# Altium PCB Main.PcbDoc
Units mm, origin at the board's own origin, x right, y up, seen from the top; angles counter-clockwise.
Board outline 100 x 100 mm, 2 copper layers (Top Layer, Bottom Layer), stack 1.56 mm thick; 99 components, 77 nets, 372 pads, 0 vias.
Unrouted connection lines stored in the file: 255.
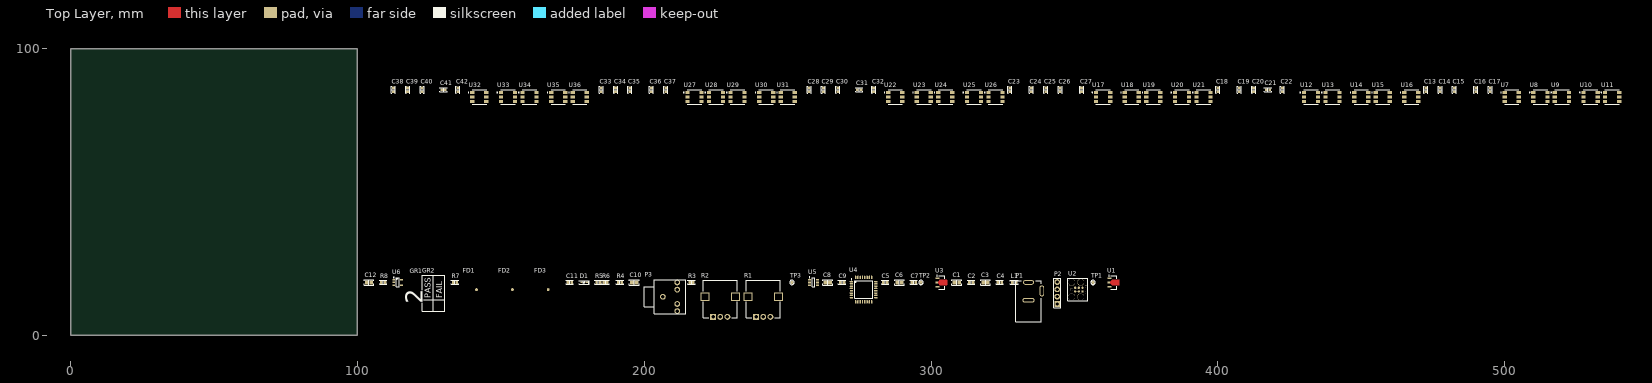
[diagram p0: Top Layer view]
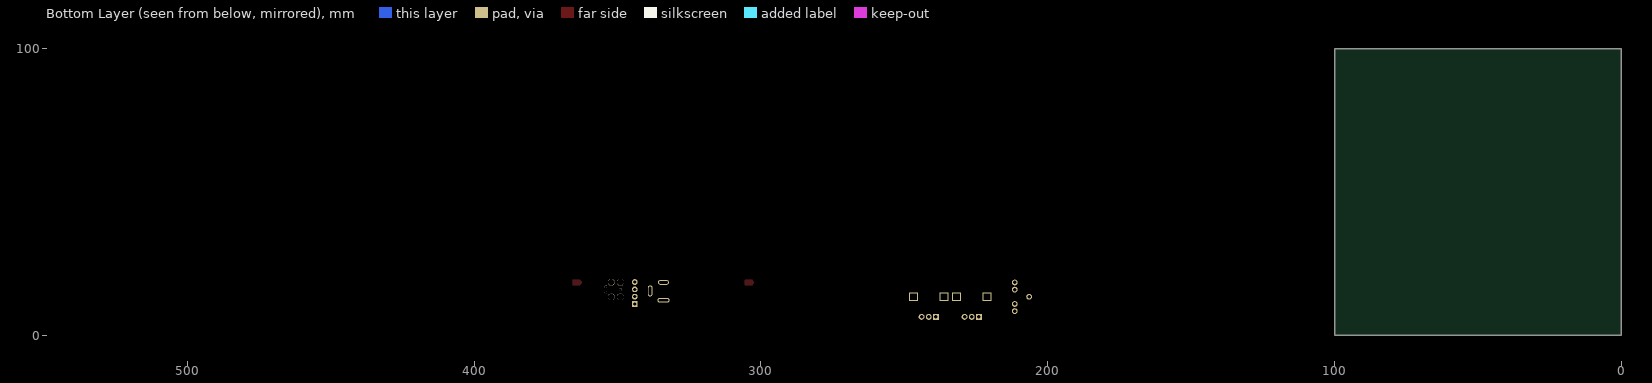
[diagram p1: Bottom Layer view, seen from below]

## Layer stack, top to bottom
Top Solder: solder mask 0.02, Solder Resist, Dk 3.5
Top Layer: signal copper 0.03
Dielectric 1: dielectric 1.5, FR-4, Dk 4.8
Bottom Layer: signal copper 0.03
Bottom Solder: solder mask 0.02, Solder Resist, Dk 3.5

## Board outline
0,0 100,0 100,100 0,100

## Design rules (kind name [scope] priority, off if disabled: settings)
AcuteAngle [All] p1: minimum=6.00000000000000E+0001 checktracksonly=TRUE
AssemblyTestPointUsage [(not InNetClass('NOTESTPOINTS'))] p1: allowmultiple=TRUE
AssemblyTestPointUsage AssemblyTestPointUsageN [InNetClass('NOTESTPOINTS')] p2: valid=2 allowmultiple=TRUE
AssemblyTestpoint [All] p1: testpointundercomponent=TRUE minsize=0.8 maxsize=2 preferedsize=1 minholesize=0 maxholesize=0.35 preferedholesize=0 testpointgrid=1.27 usegrid=FALSE gridoriginx=87.5 gridoriginy=62.5 gridtolerance=0 allowsidetop=TRUE minspacing=2.54 // Zollner
BoardOutlineClearance BoardCopperOutlineClearance [(OnLayer('Top Layer') OR OnLayer('Bottom Layer') )] p1: gap=0.5 ignorepadtopadclearanceinfootprint=FALSE except(1: Poly-OutlineEdge Region-OutlineEdge; 1.5: SMDPad-OutlineEdge THPad-OutlineEdge)
Clearance PadToViaClearance [IsVia and not IsComponentVia vs IsPad] p1: gap=0.025 ignorepadtopadclearanceinfootprint=TRUE
Clearance "Clearance NOTSELV-SELV" [InNetClass('NOTSELV') vs NOT InNetClass('NOTSELV')] p2: gap=6 ignorepadtopadclearanceinfootprint=FALSE // according to previous calio PCB
Clearance "Clearance (FAB)" [All] p3: gap=0.203 ignorepadtopadclearanceinfootprint=TRUE except(0.305: Arc-Poly Track-Poly SMDPad-Poly THPad-Poly Via-Poly Fill-Poly Poly-Poly)
ComponentClearance ComponentClearance_NetTie [((ObjectKind = 'Component') And (ComponentType = 'Net Tie')) Or (Footprint = 'StarPoint') Or (Footprint like 'NetTieVia*')] p1: gap=-3.81 collisioncheckmode=3 verticalgap=-3.81 showdistances=FALSE
ComponentClearance [All] p2: gap=0.254 collisioncheckmode=3 verticalgap=0.254 showdistances=FALSE
DiffPairsRouting [All] p1: maxlimit=1.27 minlimit=0.203 mostfreqgap=0.203 toplayer_minwidth=0.152 toplayer_maxwidth=2.54 toplayer_prefwidth=0.254 bottomlayer_minwidth=0.152 bottomlayer_maxwidth=2.54 bottomlayer_prefwidth=0.254 maxuncoupledlength=12.7
FabricationTestPointUsage [All] p1: valid=2 allowmultiple=FALSE
FabricationTestpoint [All] p1: side=3 testpointundercomponent=TRUE minsize=1.016 maxsize=2.54 preferedsize=1.524 minholesize=0 maxholesize=1.016 preferedholesize=0.813 testpointgrid=0.025 allowsidetop=TRUE allowsidebottom=TRUE usegrid=FALSE gridtolerance=0
HoleSize [All] p1: absolutevalues=TRUE maxlimit=6.35 minlimit=0.3 maxpercent=80.000 minpercent=20.000 // Zollner
HoleToHoleClearance HoleToHoleClearance_NetTieVia [InPadClass('NetTieVias') vs InPadClass('NetTieVias')] p1: gap=0 allowstackedmicrovias=TRUE
HoleToHoleClearance [All] p2: gap=0.25 allowstackedmicrovias=TRUE // Zollner
MinimumAnnularRing [All] p1: minimumring=0.15 // PCBWAY
MinimumSolderMaskSliver [All] p1: minsoldermaskwidth=0.2 // Zollner
PlaneClearance PlaneClearance_1 [All] p1: clearance=0.508
PlaneConnect [All] p1: pad.planeconnectstyle=Relief pad.reliefexpansion=0.508 pad.reliefentries=4 pad.reliefconductorwidth=0.254 pad.reliefairgap=0.254 via.planeconnectstyle=Direct via.reliefexpansion=0.508 via.reliefentries=4 via.reliefconductorwidth=0.254 via.reliefairgap=0.254
PolygonConnect [All] p1: thpad.connectstyle=Relief thpad.reliefconductorwidth=0.254 thpad.reliefentries=4 thpad.polygonreliefangle="90 Angle" thpad.airgapwidth=0.254 smdpad.connectstyle=Relief smdpad.reliefconductorwidth=0.254 smdpad.reliefentries=4 smdpad.polygonreliefangle="90 Angle" smdpad.airgapwidth=0.254 via.connectstyle=Direct via.reliefconductorwidth=0.254 via.reliefentries=4 via.polygonreliefangle="90 Angle" via.airgapwidth=0.254
RoomDefinition Main_LEDs [InComponentClass('Main_LEDs')] p1: confinementstyle=ConfineIn formatcopy=TRUE lockcomponents=FALSE outline 110,78.175 542.5,78.175 542.5,90.675 110,90.675
RoomDefinition Main [InComponentClass('Main')] p2: confinementstyle=ConfineIn formatcopy=TRUE lockcomponents=FALSE outline 101.5,3.5 366.5,3.5 366.5,26 101.5,26
RoutingVias [All] p1: holewidth=0.35 width=0.7 viastyle="Through Hole" minholewidth=0.3 minwidth=0.6 maxholewidth=1.27 maxwidth=1.27
SMDEntry [not IsTestpoint] p1: side=TRUE corner=TRUE anyangle=FALSE
SMDNeckDown [not IsTestpoint] p1: percent=90.000
SMDToCorner [All] p1: distance=10000
SMDToPlane [All] p1: distance=0
ShortCircuit [All vs not IsBoardCutoutRegion] p1: allowed=FALSE
SilkToSolderMaskClearance [IsPad] p1: minsilkscreentomaskgap=0.127 clearancetoexposedcopper=TRUE
SolderMaskExpansion [All] p1: expansion=0.05 istentingtop=FALSE // Zollner
SolderMaskExpansion SolderMaskExpansionToHoles [All] p2: expansion=0.1 istentingtop=FALSE soldermaskfromhole=TRUE // Zollner
UnRoutedNet [All] p1: checkbadconnections=TRUE
Width [All] p1: maxlimit=12.7 minlimit=0.203 preferedwidth=0.254
16 further rules are at their usual default settings.

## Classes and differential pairs
component class Main: C1 C2 C3 C4 C5 C6 C7 C8 C9 C10 C11 C12 D1 FD1 FD2 FD3 GR1 GR2 L1 P1 P2 P3 R1 R2 R3 R4 R5 R6 R7 R8 TP1 TP2 TP3 U1 U2 U3 U4 U5 U6
component class Main_LEDs: C13 C14 C15 C16 C17 C18 C19 C20 C21 C22 C23 C24 C25 C26 C27 C28 C29 C30 C31 C32 C33 C34 C35 C36 C37 C38 C39 C40 C41 C42 U7 U8 U9 U10 U11 U12 U13 U14 U15 U16 U17 U18 U19 U20 U21 U22 U23 U24 U25 U26 U27 U28 U29 U30 U31 U32 U33 U34 U35 U36

## Components (designator, comment, footprint, x,y, rotation, side; value= is the part's Value field where it differs from the comment)
C1 "10uF" "CAP 0805_2012" 309,18.5 r0 top
C2 "100nF" "CAP 0603_1608" 314,18.5 r0 top
C3 "10uF" "CAP 0805_2012" 319,18.5 r0 top
C4 "100nF" "CAP 0603_1608" 324,18.5 r0 top
C5 "100nF" "CAP 0603_1608" 284,18.5 r0 top
C6 "10uF" "CAP 0805_2012" 289,18.5 r0 top
C7 "100nF" "CAP 0603_1608" 294,18.5 r0 top
C8 "10uF" "CAP 0805_2012" 264,18.5 r0 top
C9 "100nF" "CAP 0603_1608" 269,18.5 r0 top
C10 "10uF" "CAP 0805_2012" 196.5,18.5 r0 top
C11 "100nF" "CAP 0603_1608" 174,18.5 r0 top
C12 "10uF" "CAP 0805_2012" 104,18.5 r0 top
C13 "100nF" "CAP 0603_1608" 472.5,85.675 r90 top
C14 "100nF" "CAP 0603_1608" 477.5,85.675 r90 top
C15 "100nF" "CAP 0603_1608" 482.5,85.675 r90 top
C16 "100nF" "CAP 0603_1608" 490,85.675 r90 top
C17 "100nF" "CAP 0603_1608" 495,85.675 r90 top
C18 "100nF" "CAP 0603_1608" 400,85.675 r90 top
C19 "100nF" "CAP 0603_1608" 407.5,85.675 r90 top
C20 "100nF" "CAP 0603_1608" 412.5,85.675 r90 top
C21 "100nF" "CAP 0603_1608" 417.5,85.675 r0 top
C22 "100nF" "CAP 0603_1608" 422.5,85.675 r90 top
C23 "100nF" "CAP 0603_1608" 327.5,85.675 r90 top
C24 "100nF" "CAP 0603_1608" 335,85.675 r90 top
C25 "100nF" "CAP 0603_1608" 340,85.675 r90 top
C26 "100nF" "CAP 0603_1608" 345,85.675 r90 top
C27 "100nF" "CAP 0603_1608" 352.5,85.675 r90 top
C28 "100nF" "CAP 0603_1608" 257.5,85.675 r90 top
C29 "100nF" "CAP 0603_1608" 262.5,85.675 r90 top
C30 "100nF" "CAP 0603_1608" 267.5,85.675 r90 top
C31 "100nF" "CAP 0603_1608" 275,85.675 r0 top
C32 "100nF" "CAP 0603_1608" 280,85.675 r90 top
C33 "100nF" "CAP 0603_1608" 185,85.675 r90 top
C34 "100nF" "CAP 0603_1608" 190,85.675 r90 top
C35 "100nF" "CAP 0603_1608" 195,85.675 r90 top
C36 "100nF" "CAP 0603_1608" 202.5,85.675 r90 top
C37 "100nF" "CAP 0603_1608" 207.5,85.675 r90 top
C38 "100nF" "CAP 0603_1608" 112.5,85.675 r90 top
C39 "100nF" "CAP 0603_1608" 117.5,85.675 r90 top
C40 "100nF" "CAP 0603_1608" 122.5,85.675 r90 top
C41 "100nF" "CAP 0603_1608" 130,85.675 r0 top
C42 "100nF" "CAP 0603_1608" 135,85.675 r90 top
D1 "3.3V" SOD523F 179,18.5 r0 top
FD1 "IPC-7351A FIDUCIAL" FIDUCIAL-IPC-7351A 141.5,16 r0 top
FD2 "IPC-7351A FIDUCIAL" FIDUCIAL-IPC-7351A 154,16 r0 top
FD3 "IPC-7351A FIDUCIAL" FIDUCIAL-IPC-7351A 166.5,16 r0 top
GR1 "Fermium logo" FERMIUM_LTD_LOGO_SILKSCREEN_10 121.5,11 r90 top
GR2 "PASS-FAIL" 0B1556B7-A534-4801-B57D-01EFA34B1205 126.5,8.5 r90 top
L1 "MPZ1608S102ATA00" "FER 0603_1608" 329,18.5 r0 top
P1 "DC-005A-20A" F0972D8A-C5C0-4A84-836D-A9666EE65C2D 334,18.5 r90 top
P2 "Header 4" e9c29c42-54d9-41fd-bacf-81f9be1beea3 344,11 r90 top
P3 "PJ-3900-04" 7EF2B92C-0FC9-4C85-B662-5CEC65BFCCC4 206.5,13.5 r0 top
R1 "10K" 62a97406-280f-49a8-9d3d-28b5dbb37269 241.5,13.5 r0 top
R2 "10K" 62a97406-280f-49a8-9d3d-28b5dbb37269 226.5,13.5 r0 top
R3 "10K" "RES 0603_1608" 216.5,18.5 r0 top
R4 "1K" "RES 0603_1608" 191.5,18.5 r0 top
R5 "10K" "RES 0603_1608" 184,18.5 r0 top
R6 "10K" "RES 0603_1608" 186.5,18.5 r0 top
R7 "10K" "RES 0603_1608" 134,18.5 r0 top
R8 "10K" "RES 0603_1608" 109,18.5 r0 top
TP1 "GENERIC_TP" TESTPOINT_PAD_1 356.5,18.5 r0 top
TP2 "GENERIC_TP" TESTPOINT_PAD_1 296.5,18.5 r90 top
TP3 "GENERIC_TP" TESTPOINT_PAD_1 251.5,18.5 r90 top
U1 "AS78L05RTR-E1" E733EFB9-FE91-4AE9-9197-29251971C3DC 364,18.5 r0 top
U2 "PCB TC-2030" 2B810B8A-BCA2-4013-BFB9-397E8F2967E9 349,16 r0 top
U3 "L78L33ACUTR" E733EFB9-FE91-4AE9-9197-29251971C3DC 304,18.5 r0 top
U4 "STM32G031K6T6" "ST LQFP-32 7X7MM" 276.5,16 r0 top
U5 "74LVC1T45W6-7" cf179999-1370-4c97-8dae-266d481a25b7 259,18.5 r0 top
U6 "LMV321TP-TR" "TI SOT-23-5 DBV" 114,18.5 r0 top
U7 "WS2815B" C2100EF9-5A1B-4012-AEAB-289AE8E97B6B 502.5,83.175 r0 top
U8 "WS2815B" C2100EF9-5A1B-4012-AEAB-289AE8E97B6B 512.5,83.175 r0 top
U9 "WS2815B" C2100EF9-5A1B-4012-AEAB-289AE8E97B6B 520,83.175 r0 top
U10 "WS2815B" C2100EF9-5A1B-4012-AEAB-289AE8E97B6B 530,83.175 r0 top
U11 "WS2815B" C2100EF9-5A1B-4012-AEAB-289AE8E97B6B 537.5,83.175 r0 top
U12 "WS2815B" C2100EF9-5A1B-4012-AEAB-289AE8E97B6B 432.5,83.175 r0 top
U13 "WS2815B" C2100EF9-5A1B-4012-AEAB-289AE8E97B6B 440,83.175 r0 top
U14 "WS2815B" C2100EF9-5A1B-4012-AEAB-289AE8E97B6B 450,83.175 r0 top
U15 "WS2815B" C2100EF9-5A1B-4012-AEAB-289AE8E97B6B 457.5,83.175 r0 top
U16 "WS2815B" C2100EF9-5A1B-4012-AEAB-289AE8E97B6B 467.5,83.175 r0 top
U17 "WS2815B" C2100EF9-5A1B-4012-AEAB-289AE8E97B6B 360,83.175 r0 top
U18 "WS2815B" C2100EF9-5A1B-4012-AEAB-289AE8E97B6B 370,83.175 r0 top
U19 "WS2815B" C2100EF9-5A1B-4012-AEAB-289AE8E97B6B 377.5,83.175 r0 top
U20 "WS2815B" C2100EF9-5A1B-4012-AEAB-289AE8E97B6B 387.5,83.175 r0 top
U21 "WS2815B" C2100EF9-5A1B-4012-AEAB-289AE8E97B6B 395,83.175 r0 top
U22 "WS2815B" C2100EF9-5A1B-4012-AEAB-289AE8E97B6B 287.5,83.175 r0 top
U23 "WS2815B" C2100EF9-5A1B-4012-AEAB-289AE8E97B6B 297.5,83.175 r0 top
U24 "WS2815B" C2100EF9-5A1B-4012-AEAB-289AE8E97B6B 305,83.175 r0 top
U25 "WS2815B" C2100EF9-5A1B-4012-AEAB-289AE8E97B6B 315,83.175 r0 top
U26 "WS2815B" C2100EF9-5A1B-4012-AEAB-289AE8E97B6B 322.5,83.175 r0 top
U27 "WS2815B" C2100EF9-5A1B-4012-AEAB-289AE8E97B6B 217.5,83.175 r0 top
U28 "WS2815B" C2100EF9-5A1B-4012-AEAB-289AE8E97B6B 225,83.175 r0 top
U29 "WS2815B" C2100EF9-5A1B-4012-AEAB-289AE8E97B6B 232.5,83.175 r0 top
U30 "WS2815B" C2100EF9-5A1B-4012-AEAB-289AE8E97B6B 242.5,83.175 r0 top
U31 "WS2815B" C2100EF9-5A1B-4012-AEAB-289AE8E97B6B 250,83.175 r0 top
U32 "WS2815B" C2100EF9-5A1B-4012-AEAB-289AE8E97B6B 142.5,83.175 r0 top
U33 "WS2815B" C2100EF9-5A1B-4012-AEAB-289AE8E97B6B 152.5,83.175 r0 top
U34 "WS2815B" C2100EF9-5A1B-4012-AEAB-289AE8E97B6B 160,83.175 r0 top
U35 "WS2815B" C2100EF9-5A1B-4012-AEAB-289AE8E97B6B 170,83.175 r0 top
U36 "WS2815B" C2100EF9-5A1B-4012-AEAB-289AE8E97B6B 177.5,83.175 r0 top

## Footprints (in the part's own frame and the unit in brackets; to place one, negate y for a bottom-side part, rotate by r counter-clockwise, add the part's x,y. Pads: shape width x height; smd on the part's side, far side on the other; paste and mask are expansions set on the pad)
0B1556B7-A534-4801-B57D-01EFA34B1205 [mm]
  silkscreen extent 0,-4 12.5,4
2B810B8A-BCA2-4013-BFB9-397E8F2967E9 [mil]
  round 31 smd paste-393.7: 1(50,-25) 2(50,25) 3(100,-25) 4(100,25) 5(150,-25) 6(150,25)
  round 34 hole 35 unplated: A(0,0) B(200,40) C(200,-40)
  round 92 hole 93 unplated: D(0,-100) E(125,-100) F(0,100) G(125,100)
  silkscreen extent -55,-155 225,155
7EF2B92C-0FC9-4C85-B662-5CEC65BFCCC4 [mm]
  round 0 hole 1.5 unplated: 1(0,-5) 1(0,5)
  round 2 hole 1.2: 1(0,0) 2(5,5) 3(5,-5) 4(5,2.5) 5(5,-2.5)
  silkscreen extent -6.5,-6 8,6, body extent -6.5,-5.9 8,5.9, height 10
62a97406-280f-49a8-9d3d-28b5dbb37269 [mm]
  rect 2.05x2.05 hole 1.2: 1(-2.5,-7)
  round 2.05 hole 1.2: 2(0,-7) 3(2.5,-7)
  rect 3.05x2.85 hole 2.2 square: 4(-5.3,0) 4(5.3,0)
  silkscreen extent -6,-7.25 6,5.75, body extent -5.7,-7.15 5.7,5.5, height 19.9
C2100EF9-5A1B-4012-AEAB-289AE8E97B6B [mm]
  rect 1.5x1 smd paste+0 mask+0: 1(-2.45,1.6) 2(-2.45,0) 3(-2.45,-1.6) 4(2.45,-1.6) 5(2.45,0) 6(2.45,1.6)
  silkscreen extent -3.87,-2.5 2.5,2.5, body extent -3.3,-2.6 3.3,2.6, height 0.25
"CAP 0603_1608" [mm] "Chip Capacitor, 2-Leads, Body 1.60x0.80mm, IPC Medium Density"
  rect 0.9x1 smd: 1(-0.675,0) 2(0.675,0)
  silkscreen extent -1.27,-0.7 1.27,0.7, body extent -0.8,-0.41 0.8,0.41, height 0.82
"CAP 0805_2012" [mm] "Chip Capacitor, 2-Leads, Body 2.00x1.20mm, IPC Medium Density"
  rect 1.3x1.4 smd: 1(-0.8,0) 2(0.8,0)
  silkscreen extent -1.7,-0.9 1.7,0.9, body extent -1,-0.64 1,0.64, height 1.26
cf179999-1370-4c97-8dae-266d481a25b7 [mm] "SOT23, 6-Leads, Body 3.00x2.85mm, Pitch 0.95mm, IPC Medium Density"
  rect 1.05x0.6 smd: 1(-1.375,0.95) 2(-1.375,0) 3(-1.375,-0.95) 4(1.375,-0.95) 5(1.375,0) 6(1.375,0.95)
  silkscreen extent -1.5,-1.55 0.45,1.92, body extent -1.5,-1.55 1.5,1.55, height 1.85
e9c29c42-54d9-41fd-bacf-81f9be1beea3 [mm]
  rect 2x2 hole 1.1: 1(0,0)
  round 2 hole 1.1: 2(2.54,0) 3(5.08,0) 4(7.62,0)
  silkscreen extent -1.27,-1.27 8.89,1.27, body extent -1.27,-1.27 8.89,1.27, height 8.89
E733EFB9-FE91-4AE9-9197-29251971C3DC [mm]
  rect 1.4x0.6 smd: 1(-1.823,1.5) 3(-1.823,-1.5)
  rect 1x0.6 smd: 2(-2.023,0)
  Top Layer region: -1.523,0.3 -0.873,0.95 1.552,0.95 1.678,0.825 1.678,-0.825 1.552,-0.95 -0.873,-0.95 -1.523,-0.3
  silkscreen extent -2.07,-2.3 0.83,2.47, body extent -2.47,-2.25 1.68,2.25, height 1.5
F0972D8A-C5C0-4A84-836D-A9666EE65C2D [mm]
  oval 1.65x3.85 hole 0.8 slot 3 at 90 deg: 1(0,0)
  oval 1.65x4.2 hole 0.8 slot 3.35 at 90 deg: 2(-6.2,0)
  oval 3.85x1.65 hole 0.8 slot 3 at 0 deg: 3(-2.95,-4.65)
  silkscreen extent -13.7,-4.5 0.5,4.5, body extent -13.67,-4.75 0.43,4.55, height 10.9
"FER 0603_1608" [mm] "Chip Ferrite, 2-Leads, Body 1.60x0.80mm, IPC Medium Density"
  rect 0.9x1 smd: 1(-0.675,0) 2(0.675,0)
  silkscreen extent -1.4,-0.7 1.4,0.7, body extent -0.8,-0.41 0.8,0.41, height 0.82
FERMIUM_LTD_LOGO_SILKSCREEN_10 [mm]
FIDUCIAL-IPC-7351A [mm]
  round 1 smd paste-2.54 mask+1: 5(0,0)
  Top Layer pour cut-out: 0,-1.5 -0.574,-1.386 -1.061,-1.061 -1.386,-0.574 -1.5,0 -1.5,0 -1.386,0.574 -1.061,1.061 -0.574,1.386 0,1.5 0,1.5 0.574,1.386 1.061,1.061 1.386,0.574 1.5,0 1.5,0 1.386,-0.574 1.061,-1.061 0.574,-1.386 0,-1.5
"RES 0603_1608" [mm] "Chip Resistor, 2-Leads, Body 1.60x0.80mm, IPC Medium Density"
  rect 0.85x0.95 smd: 1(-0.65,0) 2(0.65,0)
  silkscreen extent -1.27,-0.7 1.27,0.7, body extent -0.8,-0.4 0.8,0.4, height 0.45
SOD523F [mm] "SODFL, 2-Leads, Body 0.80x1.60mm, IPC Medium Density"
  rect 0.8x0.5 smd: 1(0.9,0) 2(-0.9,0)
  silkscreen extent -1.6,-0.64 1.8,0.64, body extent -0.8,-0.4 0.8,0.4, height 0.65
"ST LQFP-32 7X7MM" [mm] "LQFP, 32-Leads, Body 7.00x7.00mm, Pitch 0.80mm, IPC Medium Density"
  oval 1.2x0.5 smd: 1(-4.25,2.8) 2(-4.25,2) 3(-4.25,1.2) 4(-4.25,0.4) 5(-4.25,-0.4) 6(-4.25,-1.2) 7(-4.25,-2) 8(-4.25,-2.8) 17(4.25,-2.8) 18(4.25,-2) 19(4.25,-1.2) 20(4.25,-0.4) 21(4.25,0.4) 22(4.25,1.2) 23(4.25,2) 24(4.25,2.8)
  oval 0.5x1.2 smd: 9(-2.8,-4.25) 10(-2,-4.25) 11(-1.2,-4.25) 12(-0.4,-4.25) 13(0.4,-4.25) 14(1.2,-4.25) 15(2,-4.25) 16(2.8,-4.25) 25(2.8,4.25) 26(2,4.25) 27(1.2,4.25) 28(0.4,4.25) 29(-0.4,4.25) 30(-1.2,4.25) 31(-2,4.25) 32(-2.8,4.25)
  silkscreen extent -4.37,-3.1 3.1,3.72, body extent -4.51,-4.51 4.51,4.51, height 1.55
TESTPOINT_PAD_1 [mm]
  round 1 smd: 1(0,0)
  silkscreen extent -0.76,-0.76 0.76,0.76
"TI SOT-23-5 DBV" [mm] "SOT23, 5-Leads, Body 2.90x2.80mm, Pitch 0.95mm, IPC Medium Density"
  rect 1x0.55 smd: 1(-1.35,0.95) 2(-1.35,0) 3(-1.35,-0.95) 4(1.35,-0.95) 5(1.35,0.95)
  silkscreen extent -1.47,-1.55 0.5,1.9, body extent -1.44,-1.42 1.39,1.48, height 1.5

## Part data
C1 C3 C6 C8 C10 C12: library part 1ffbe5a9-0884-4740-bdad-20a6a98400e6, "CAP SMD MLCC 10uF 25V 0805 X5R", Manufacturer 1="Samsung Electro-Mechanics", Manufacturer 2=Murata, Manufacturer Part Number 1=CL21A106KAYNNNE, Manufacturer Part Number 2=GRM21BR61E106KA73L, ComponentLink1Description=Datasheet, ComponentLink1URL=http://localhost:8080/static/files/Samsung-Electro-Mechanics-CL21A106KAYNNNE_C158502019-03-10_213827.610739.pdf?Samsung-Electro-Mechanics-CL21A106KAYNNNE_C15850.pdf, id=14779, Part Number=1ffbe5a9-0884-4740-bdad-20a6a98400e6, S 1=LCSC, S 2=LCSC, SPN 1=C15850, SPN 2=C84416
C2 C4 C5 C7 C9 C11 C13 C14 C15 C16 C17 C18 C19 C20 C21 C22 C23 C24 C25 C26 C27 C28 C29 C30 C31 C32 C33 C34 C35 C36 C37 C38 C39 C40 C41 C42: library part 02841f84-ac15-41b5-9e17-915f8f067828, "CAP SMD MLCC 100nF 25V 0603 X7R", Manufacturer 1="Samsung Electro-Mechanics", Manufacturer 2=Yageo, Manufacturer Part Number 1=CL10B104KA8NNNC, Manufacturer Part Number 2=CC0603KRX7R9BB104, ComponentLink1Description=Datasheet, ComponentLink1URL=http://localhost:8080/static/files/Samsung-Electro-Mechanics-CL10B104KA8NNNC_C15902019-03-10_215548.826887.pdf?Samsung-Electro-Mechanics-CL10B104KA8NNNC_C1590.pdf, id=14784, Part Number=02841f84-ac15-41b5-9e17-915f8f067828, S 1=LCSC, S 2=LCSC, SPN 1=C14663, SPN 2=C1590
D1: library part d6266fd0-7428-4fb9-a062-338cdce926fd, "DIODE SMD TVS 3.3V BIDIRECTIONAL SOD-523", Manufacturer 1="Born Semiconductor", Manufacturer 2=Nexperia, Manufacturer Part Number 1=PESD3V3S1BA-N, Manufacturer Part Number 2=PESD3V3S1UB,115, ComponentLink1Description=Datasheet, ComponentLink1URL=http://localhost:8080/static/files/Bourne-Semicon-Shenzhen-PESD3V3S1BA-N_C3160372019-04-07_002431.794112.pdf?Bourne-Semicon-Shenzhen-PESD3V3S1BA-N_C316037.pdf, ComponentLink2Description=Datasheet, ComponentLink2URL=http://localhost:8080/static/files/Nexperia-PESD3V3S1UB115-datasheet2019-08-16_201415.198759.pdf?Nexperia-PESD3V3S1UB,115-datasheet.pdf, id=14798, Part Number=d6266fd0-7428-4fb9-a062-338cdce926fd, S 1=LCSC, S 2=LCSC, SPN 1=C316037, SPN 2=C85377
FD1 FD2 FD3: library part 19da4612-eb95-43bb-9984-553a52b2a224, "GRAPHICS FIDUCIAL IPC-7351A", id=14800, Part Number=19da4612-eb95-43bb-9984-553a52b2a224
GR1: library part 9b9b4e4a-5411-4d6f-b18b-a922f0d19254, "GRAPHICS LOGO FERMIUM LTD", id=14856, Part Number=9b9b4e4a-5411-4d6f-b18b-a922f0d19254
GR2: library part d1abe19f-3fed-4f20-b2ed-afc0ffbc6628, "GRAPHICS PASS-FAIL MARK", id=14801, Part Number=d1abe19f-3fed-4f20-b2ed-afc0ffbc6628
L1: library part a4b2e015-bf25-47b8-954c-a5b040744a3a, "FER SMD CHIP 0603 800mA 1K@100MHz 300mOhm", Manufacturer 1=TDK, ComponentLink1Description=Datasheet, ComponentLink1URL=http://localhost:8080/static/files/TDK-MPZ1608S102ATA00_C768142019-08-18_021255.210641.pdf?TDK-MPZ1608S102ATA00_C76814.pdf, id=14850, Manufacturer Part Number 1=MPZ1608S102ATA00, Part Number=a4b2e015-bf25-47b8-954c-a5b040744a3a, S 1=LCSC, SPN 1=C76814
P1: library part b53db51a-1725-412b-9039-fa7a45c7c438, "CONN THT DC JACK 0.5A 30VDC 5Kcycles", Manufacturer 1="HRO Electronics", ComponentLink1Description=Datasheet, ComponentLink1URL="http://localhost:8080/static/files/Korean-Hroparts-Elec-DC-005A-20A_C191049_22019-03-10_214231.486078.pdf?Korean-Hroparts-Elec-DC-005A-20A_C191049 (2).pdf", id=14780, Manufacturer Part Number 1=DC-005A-20A, Part Number=b53db51a-1725-412b-9039-fa7a45c7c438, S 1=LCSC, SPN 1=C191049
P2: library part f5b883e6-c938-48c0-af3c-bf25c091d7e5, "CONN THT PIN HEADER 4P MALE 2.54mm", Manufacturer 1=Pinrex, Manufacturer 2=Mintron, Manufacturer Part Number 1=210-91-04GB01, Manufacturer Part Number 2=MTP125-1104S1, ComponentLink1Description=Datasheet, ComponentLink1URL=http://localhost:8080/static/files/1912111437_PINREX-210-91-04GB01_C3906802020-10-20_152510.967226.pdf?1912111437_PINREX-210-91-04GB01_C390680.pdf, ComponentLink2Description=Datasheet, ComponentLink2URL=http://localhost:8080/static/files/1901241805_MINTRON-MTP125-1104S1_C3586862020-10-20_152535.142763.pdf?1901241805_MINTRON-MTP125-1104S1_C358686.pdf, id=14864, Part Number=f5b883e6-c938-48c0-af3c-bf25c091d7e5, S 1=LCSC, S 2=LCSC, SPN 1=C390680, SPN 2=C358686
P3: library part 80507a24-5d7c-4cf5-953e-f54832d54564, "CONN THT 3.5mm AUDIO STEREO AUX SWITCH", Manufacturer 1="HRO Electronics", ComponentLink1Description=Datasheet, ComponentLink1URL=http://localhost:8080/static/files/Korean-Hroparts-Elec-PJ-3900-04_C1518392019-04-10_231144.687617.pdf?Korean-Hroparts-Elec-PJ-3900-04_C151839.pdf, id=14793, Manufacturer Part Number 1=PJ-3900-04, Part Number=80507a24-5d7c-4cf5-953e-f54832d54564, S 1=LCSC, SPN 1=C151839
R1 R2: library part 811e8213-c804-44c4-a27d-e9429bf8a5f3, "POT 10K 20% SHAFT 6mmx20mm LIN", Manufacturer 1=ALPS, Manufacturer Part Number 1=RK09K1130AAU, ComponentLink1Description=Datasheet, ComponentLink1URL=http://localhost:8080/static/files/ALPS-Electric-RK09K1130AAU_C2023732020-10-20_140659.863467.pdf?ALPS-Electric-RK09K1130AAU_C202373.pdf, id=14863, Part Number=811e8213-c804-44c4-a27d-e9429bf8a5f3, S 1=LCSC, SPN 1=C202373
R3 R5 R6 R7 R8: library part 93242766-ba1d-462d-b58f-ce1dfc4129c8, "RES SMD 10K OHM 1% 1/10W 0603", Manufacturer 1=Yageo, Manufacturer 2=Uniroyal, Manufacturer Part Number 1=RC0603FR-0710KL, Manufacturer Part Number 2=0603WAF1002T5E, id=12101, Part Number=93242766-ba1d-462d-b58f-ce1dfc4129c8, S 1=LCSC, S 2=LCSC, SPN 1=C98220, SPN 2=C25804
R4: library part a678220f-9e9d-4863-a833-9993504f723c, "RES SMD 1K OHM 1% 1/10W 0603", Manufacturer 1=Yageo, Manufacturer 2=Uniroyal, Manufacturer Part Number 1=RC0603FR-071KL, Manufacturer Part Number 2=0603WAF1001T5E, id=14794, Part Number=a678220f-9e9d-4863-a833-9993504f723c, S 1=LCSC, S 2=LCSC, SPN 1=C21190, SPN 2=C22548
TP1 TP2 TP3: library part f8b69d87-0719-4ff6-a360-6747ce659b9b, "GRAPHICS TESTPOINT", id=14821, Part Number=f8b69d87-0719-4ff6-a360-6747ce659b9b
U1: library part fd64863e-487f-4688-b264-696c0ba5456b, "IC SMD LINEAR VOLTAGE REGULATOR 5V 100mA SOT-89", Manufacturer 1="Diodes Inc.", Manufacturer 2="KIA Semicon Tech", Manufacturer Part Number 2=KIA78L05T, ComponentLink1Description=Datasheet, ComponentLink1URL="http://localhost:8080/static/files/Diodes-Incorporated-AS78L05RTR-E1_C90471_12019-03-10_215252.941962.pdf?Diodes-Incorporated-AS78L05RTR-E1_C90471 (1).pdf", ComponentLink2Description=Datasheet, ComponentLink2URL="http://localhost:8080/static/files/KIA-Semicon-Tech-KIA78L05T_C90763_12019-03-10_215415.523371.pdf?KIA-Semicon-Tech-KIA78L05T_C90763 (1).pdf", id=14783, Manufacturer Part Number 1=AS78L05RTR-E1, Part Number=fd64863e-487f-4688-b264-696c0ba5456b, S 1=LCSC, S 2=LCSC, SPN 1=C90763, SPN 2=C90471
U2: library part cfe3e949-5a4b-49e1-a947-d770435823fb, "CONN PCB TC-2030 6-PIN ICT/JTAG/SWD", Manufacturer 1=---, ComponentLink1Description=Datasheet, ComponentLink1URL=http://localhost:8080/static/files/TC2030-IDC-NL2019-05-03_011703.589349.pdf?TC2030-IDC-NL.pdf, id=14818, Manufacturer Part Number 1=---, Part Number=cfe3e949-5a4b-49e1-a947-d770435823fb
U3: library part 8cc975d7-ef9f-4621-a9d5-14e4ba8cc85a, "IC SMD LINEAR VOLTAGE REGULATOR 3.3V 100mA SOT-89", Manufacturer 1="ST Microelectronics", Manufacturer 2="Diodes Inc.", Manufacturer Part Number 2=AZ1117R-3.3TRE1, ComponentLink1Description=Datasheet, ComponentLink1URL=http://localhost:8080/static/files/STMicroelectronics-L78L33ACUTR_C141702019-04-29_215238.249911.pdf?STMicroelectronics-L78L33ACUTR_C14170.pdf, id=14809, Manufacturer Part Number 1=L78L33ACUTR, Part Number=8cc975d7-ef9f-4621-a9d5-14e4ba8cc85a, S 1=LCSC, S 2=LCSC, SPN 1=C108493, SPN 2=C14170
U4: library part c3cf4caa-a330-4265-b0bb-b1c1ee69c9b2, "IC SMD MICROCONTROLLER STM32GO LQFP32", Manufacturer 1="ST Microelectronics", id=14866, Manufacturer Part Number 1=STM32G031K6T6, Part Number=c3cf4caa-a330-4265-b0bb-b1c1ee69c9b2, S 1=LCSC, SPN 1=C432202
U5: library part a4959cd6-b905-4367-9309-5fa19daca31f, "IC SMD VOLTAGE LEVEL SHIFTER 1.65-5.5V 74LVC1T45 SOT-23-6", Manufacturer 1="Diodes Inc.", ComponentLink1Description=Datasheet, ComponentLink1URL=http://localhost:8080/static/files/Diodes_Inc.-74LVC1T45W6-7-datasheet2020-10-20_211713.523042.pdf?Diodes_Inc.-74LVC1T45W6-7-datasheet.pdf, id=14865, Manufacturer Part Number 1=74LVC1T45W6-7, Part Number=a4959cd6-b905-4367-9309-5fa19daca31f, S 1=LCSC, SPN 1=C168856
U6: library part 1bb11b1d-9594-42ee-994b-3a976eac3d2a, "IC SMD OPAMP 1X 3.5mV RRIO 6V 45mA [ANY C LOAD STABLE] LMV31TP SOT-23-5", Manufacturer 1=3Peak, ComponentLink1Description=Datasheet, ComponentLink1URL=http://localhost:8080/static/files/LMV321TP-LMV358TP-LMV324TP2020-10-20_131739.786170.pdf?LMV321TP-LMV358TP-LMV324TP.pdf, id=14862, Manufacturer Part Number 1=LMV321TP-TR, Part Number=1bb11b1d-9594-42ee-994b-3a976eac3d2a, S 1=LCSC, SPN 1=C90297
U7 U8 U9 U10 U11 U12 U13 U14 U15 U16 U17 U18 U19 U20 U21 U22 U23 U24 U25 U26 U27 U28 U29 U30 U31 U32 U33 U34 U35 U36: library part 6f697cdb-93d0-46fc-8e29-f2cd6d395cf4, "IC SMD LED RGB DIGITAL 12V WS2815B", Manufacturer 1=Worldsemi, ComponentLink1Description=Datasheet, ComponentLink1URL=http://localhost:8080/static/files/WS2815B2020-10-20_115024.135885.pdf?WS2815B.pdf, id=14859, Manufacturer Part Number 1=WS2815B, Part Number=6f697cdb-93d0-46fc-8e29-f2cd6d395cf4, S 1=TME, SPN 1=WS2815B

## Nets (pads, with @x,y where several pads share a name; then routed paths per layer and width w, separated by ;. In a path a pad name is that pad's centre, name@x,y a point inside that pad or via, vN(x,y) a via of type N, cw(c..) or ccw(c..) an arc to the next point about the centre after c; other vN are vias at no path point)
+3V3: C7.2 C8.1 C9.2 C11.2 P2.1 R1.1 R2.1 R3.2 R7.2 TP2.1 U3.1 U4.4 U5.1 U6.5
+5: C4.2 TP1.1 U1.1 U5.5 U5.6
+12: C1.1 C2.2 C3.1 C5.2 C6.1 L1.2 U1.3 U3.3 U7.2 U8.2 U9.2 U10.2 U11.2 U12.2 U13.2 U14.2 U15.2 U16.2 U17.2 U18.2 U19.2 U20.2 U21.2 U22.2 U23.2 U24.2 U25.2 U26.2 U27.2 U28.2 U29.2 U30.2 U31.2 U32.2 U33.2 U34.2 U35.2 U36.2
\JACKPRESENT: P3.5 R3.1 U4.9
AN_INPUT: R4.1 U4.10
AN_OFFSET: R1.2 U4.7
AN_SCALE: R2.2 U4.8
AN_VGND: R6.1 U4.11 U6.3 U6.4
DIN: U5.4 U7.4 U8.6
GND: C1.2 C2.1 C3.2 C4.1 C5.1 C6.2 C7.1 C8.2 C9.1 C11.1 C12.2 C13.2 C14.2 C15.2 C16.2 C17.2 C18.2 C19.2 C20.2 C21.2 C22.2 C23.2 C24.2 C25.2 C26.2 C27.2 C28.2 C29.2 C30.2 C31.2 C32.2 C33.2 C34.2 C35.2 C36.2 C37.2 C38.2 C39.2 C40.2 C41.2 C42.2 D1.2 P1.2 P1.3 P2.4 P3.1 P3.4 R1.3 R2.3 R5.1 R8.1 U1.2 U2.5 U3.2 U4.5 U5.2 U6.2 U7.5 U7.6 U8.5 U9.5 U10.5 U11.5 U12.5 U13.5 U14.5 U15.5 U16.5 U17.5 U18.5 U19.5 U20.5 U21.5 U22.5 U23.5 U24.5 U25.5 U26.5 U27.5 U28.5 U29.5 U30.5 U31.5 U32.5 U33.5 U34.5 U35.5 U36.5
NetC10_1: C10.1 D1.1 R4.2 R6.2
NetC10_2: C10.2 P3.3 R5.2
NetC12_1: C12.1 R7.1 R8.2 U6.1
NetC13_1: C13.1 U7.1
NetC14_1: C14.1 U8.1
NetC15_1: C15.1 U9.1
NetC16_1: C16.1 U10.1
NetC17_1: C17.1 U11.1
NetC18_1: C18.1 U12.1
NetC19_1: C19.1 U13.1
NetC20_1: C20.1 U14.1
NetC21_1: C21.1 U15.1
NetC22_1: C22.1 U16.1
NetC23_1: C23.1 U17.1
NetC24_1: C24.1 U18.1
NetC25_1: C25.1 U19.1
NetC26_1: C26.1 U20.1
NetC27_1: C27.1 U21.1
NetC28_1: C28.1 U22.1
NetC29_1: C29.1 U23.1
NetC30_1: C30.1 U24.1
NetC31_1: C31.1 U25.1
NetC32_1: C32.1 U26.1
NetC33_1: C33.1 U27.1
NetC34_1: C34.1 U28.1
NetC35_1: C35.1 U29.1
NetC36_1: C36.1 U30.1
NetC37_1: C37.1 U31.1
NetC38_1: C38.1 U32.1
NetC39_1: C39.1 U33.1
NetC40_1: C40.1 U34.1
NetC41_1: C41.1 U35.1
NetC42_1: C42.1 U36.1
NetL1_1: L1.1 P1.1
NetTP3_1: TP3.1 U4.6
NetU4_18: U4.18 U5.3
NetU7_3: U7.3 U8.4 U9.6
NetU8_3: U8.3 U9.4 U10.6
NetU9_3: U9.3 U10.4 U11.6
NetU10_3: U10.3 U11.4 U12.6
NetU11_3: U11.3 U12.4 U13.6
NetU12_3: U12.3 U13.4 U14.6
NetU13_3: U13.3 U14.4 U15.6
NetU14_3: U14.3 U15.4 U16.6
NetU15_3: U15.3 U16.4 U17.6
NetU16_3: U16.3 U17.4 U18.6
NetU17_3: U17.3 U18.4 U19.6
NetU18_3: U18.3 U19.4 U20.6
NetU19_3: U19.3 U20.4 U21.6
NetU20_3: U20.3 U21.4 U22.6
NetU21_3: U21.3 U22.4 U23.6
NetU22_3: U22.3 U23.4 U24.6
NetU23_3: U23.3 U24.4 U25.6
NetU24_3: U24.3 U25.4 U26.6
NetU25_3: U25.3 U26.4 U27.6
NetU26_3: U26.3 U27.4 U28.6
NetU27_3: U27.3 U28.4 U29.6
NetU28_3: U28.3 U29.4 U30.6
NetU29_3: U29.3 U30.4 U31.6
NetU30_3: U30.3 U31.4 U32.6
NetU31_3: U31.3 U32.4 U33.6
NetU32_3: U32.3 U33.4 U34.6
NetU33_3: U33.3 U34.4 U35.6
NetU34_3: U34.3 U35.4 U36.6
NetU35_3: U35.3 U36.4
SWCLK: P2.3 U2.4 U4.25
SWDIO: P2.2 U2.2 U4.24
pads on no net: FD1.5 FD2.5 FD3.5 P3.2 R1.4 R2.4 U2.1 U2.3 U2.6 U2.A U2.B U2.C U2.D U2.E U2.F U2.G U4.1 U4.2 U4.3 U4.12 U4.13 U4.14 U4.15 U4.16 U4.17 U4.19 U4.20 U4.21 U4.22 U4.23 U4.26 U4.27 U4.28 U4.29 U4.30 U4.31 U4.32 U36.3

## Text inside footprints (layer, text, board x,y; h text height)
GR1: Top Overlay "2" at 124.743,10.989 h10 r90
GR2: Top Overlay "FAIL" at 129.5,13 h2.03 r90; Top Overlay "PASS" at 125.5,13 h2.03 r90